# Altium PCB STM32F407ZGT6(Mini)核心板--尺寸图（PCB格式）.PcbDoc
Units mm, origin at the board's own origin, x right, y up, seen from the top; angles counter-clockwise.
Board outline 59.69 x 46.99 mm, 2 copper layers (Top Layer, Bottom Layer); 7 components, 0 nets, 289 pads, 0 vias.
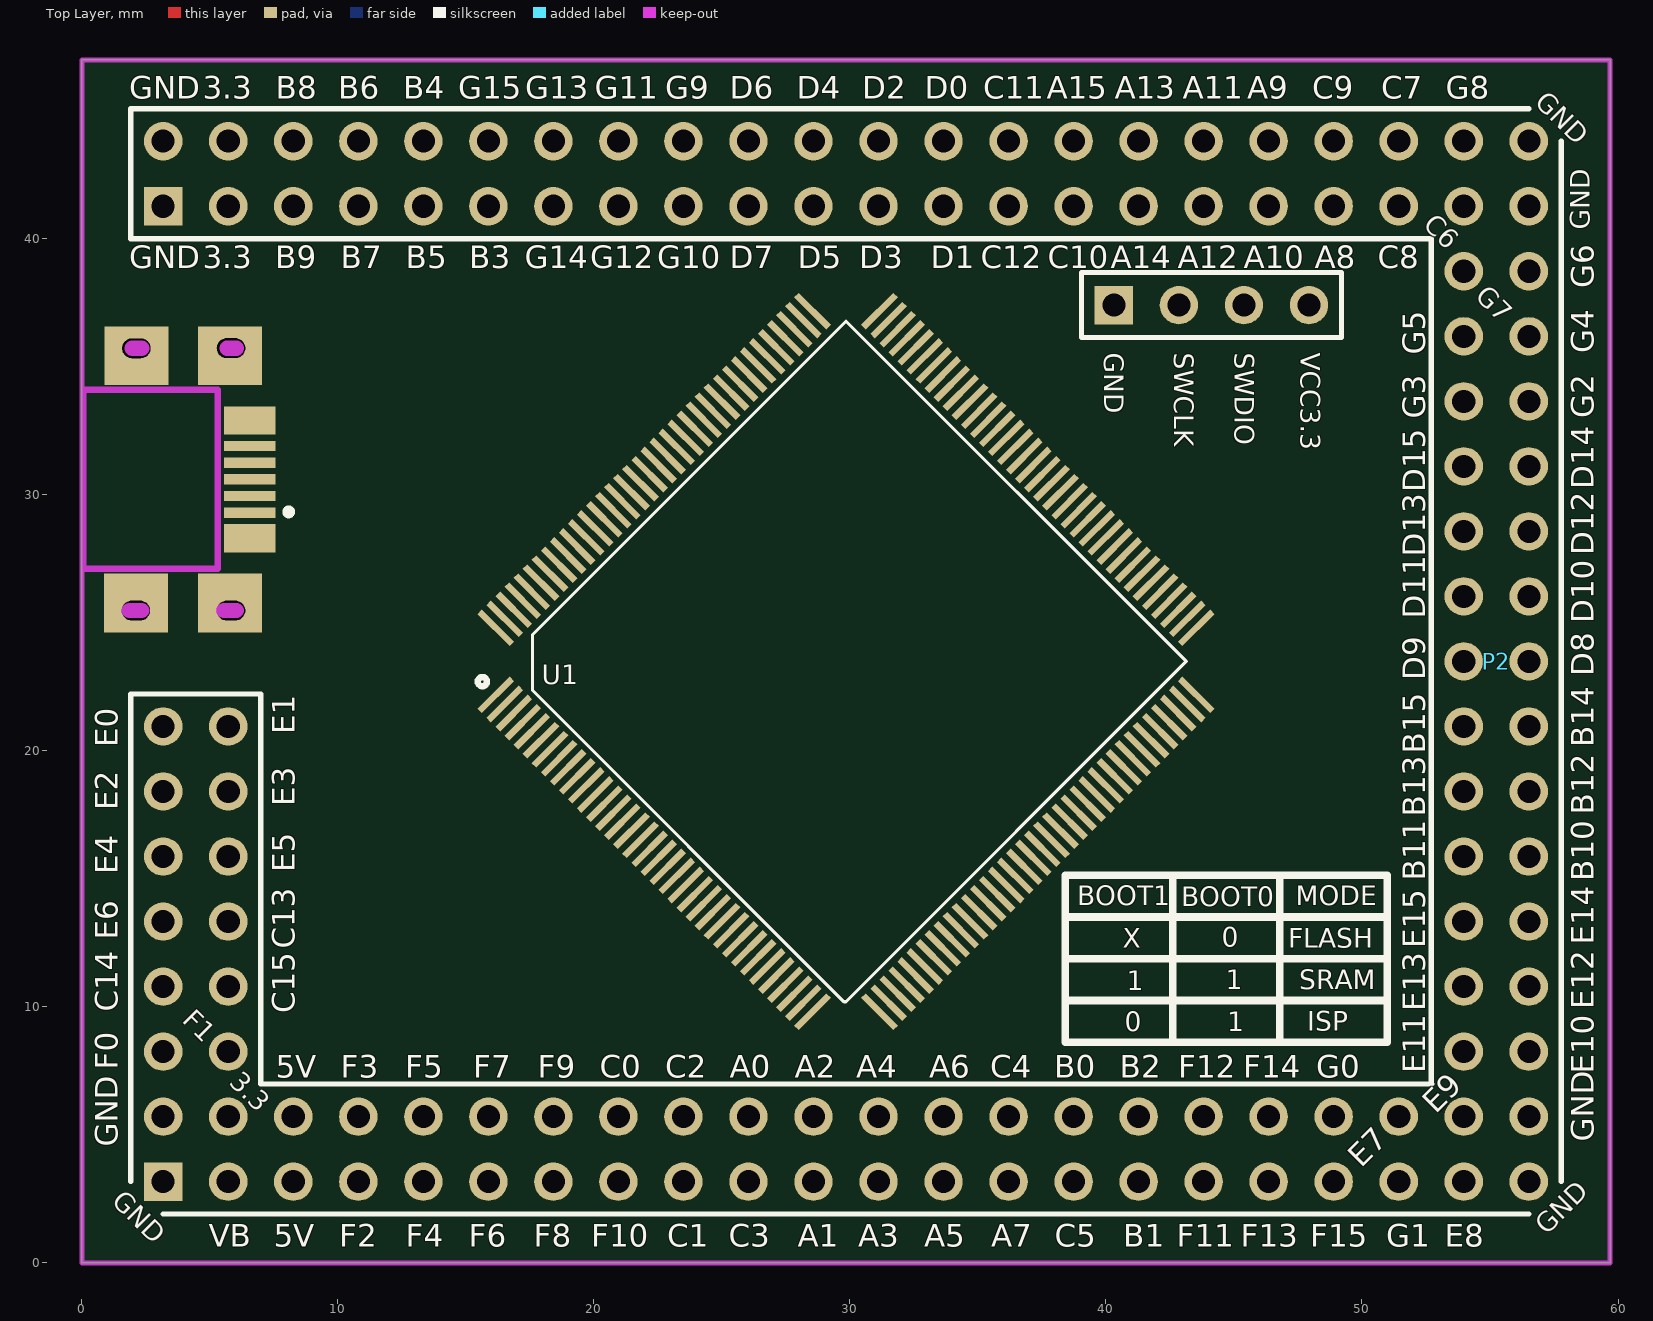
[diagram p0: Top Layer view]
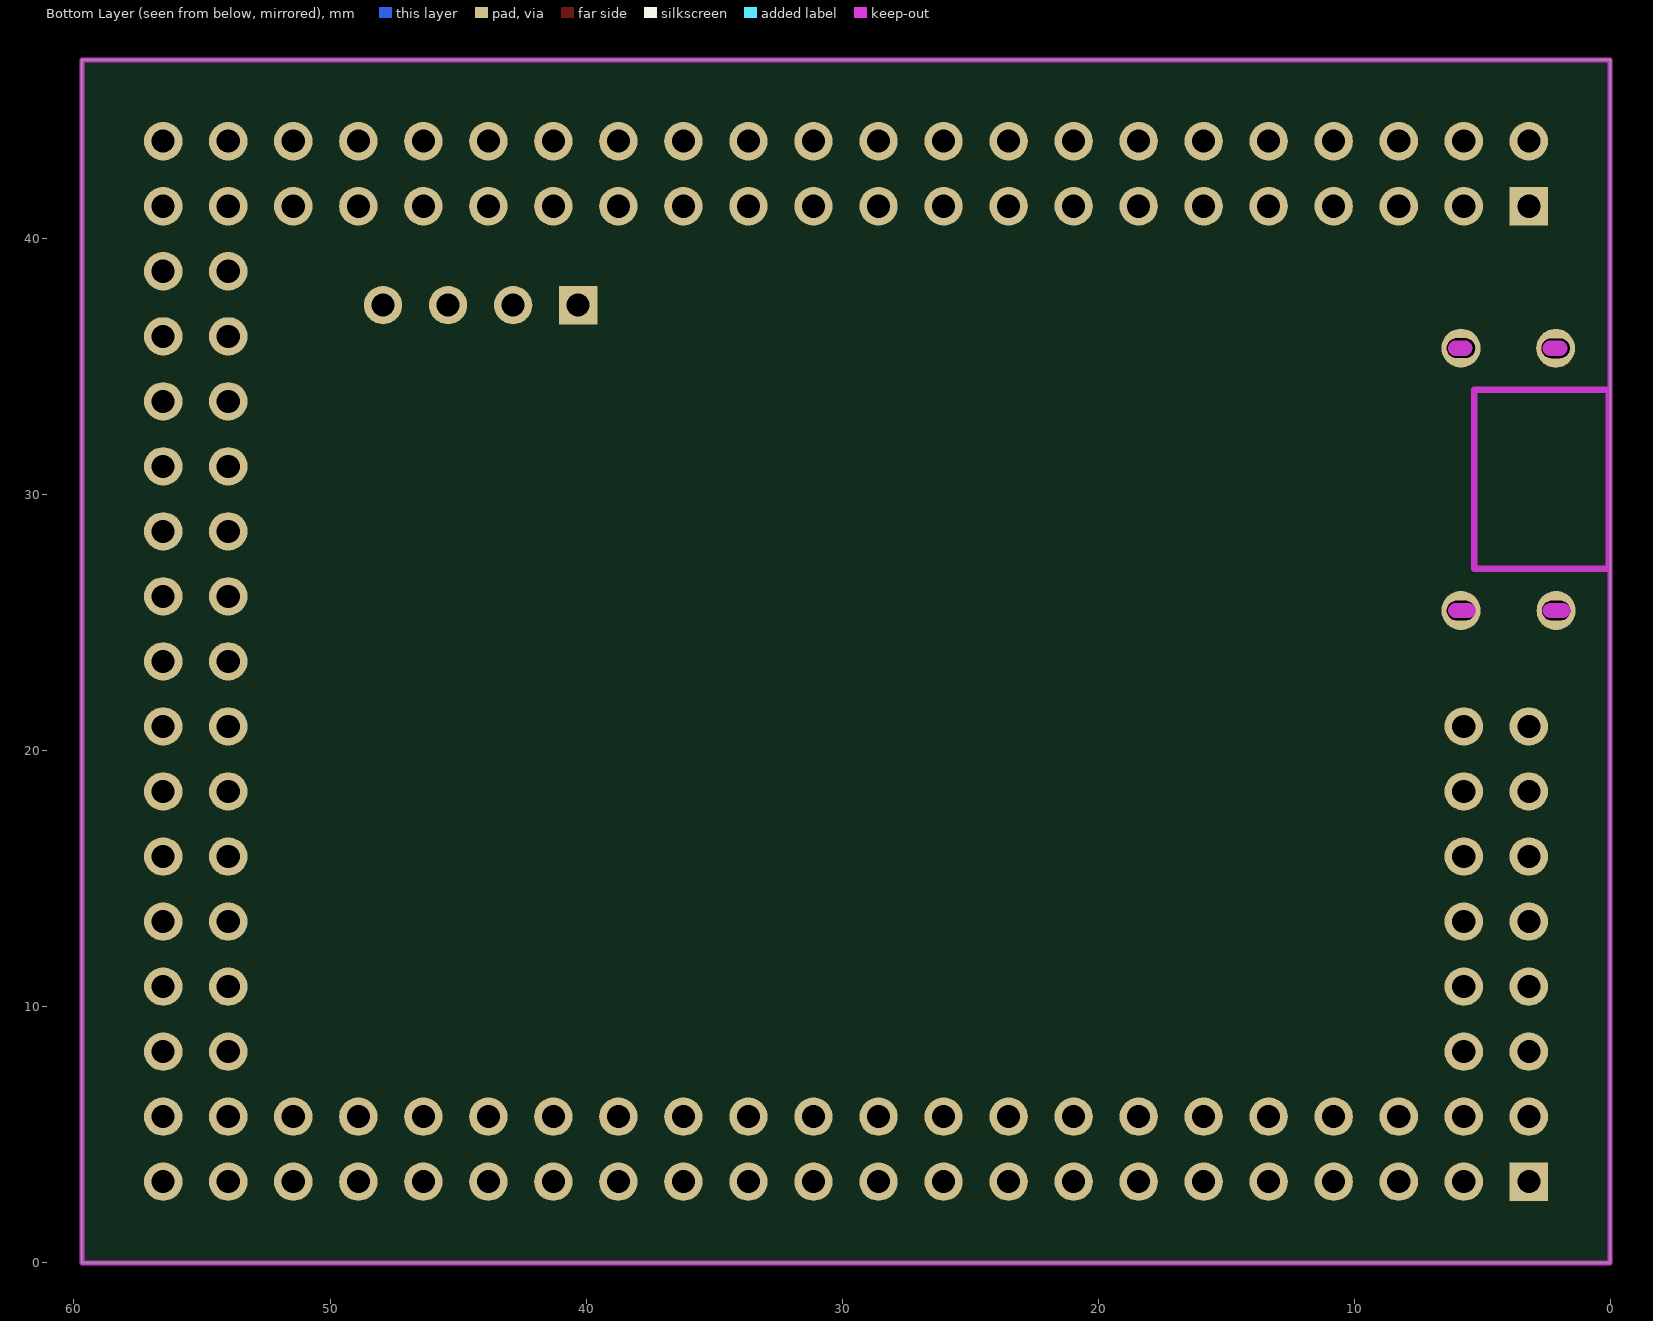
[diagram p1: Bottom Layer view, seen from below]

## Layer stack, top to bottom
Top Solder: solder mask 0.0102, Solder Resist, Dk 3.5
Top Layer: signal copper 0.0356
Dielectric1: dielectric 0.32, FR-4, Dk 4.8
Bottom Layer: signal copper 0.0356
Bottom Solder: solder mask 0.0102, Solder Resist, Dk 3.5

## Board outline
39.649,0 0,0 0,45.39 0,46.99 2.464,46.99 59.69,46.99 59.69,10.973 59.69,0 58.953,0

## Design rules (kind name [scope] priority, off if disabled: settings)
Clearance [All] p1: gap=0.203 ignorepadtopadclearanceinfootprint=FALSE except(0: Arc-Hole Track-Hole SMDPad-Hole THPad-Hole Via-Hole Fill-Hole Poly-Hole Region-Hole Text-Hole)
FabricationTestpoint [(IsPad And (OnTopLayer Or OnBottomLayer))] p1: side=3 testpointundercomponent=TRUE minsize=1.016 maxsize=2.54 preferedsize=1.524 minholesize=0 maxholesize=1.016 preferedholesize=0.813 testpointgrid=0.025 allowsidetop=TRUE allowsidebottom=TRUE usegrid=TRUE gridtolerance=0
HoleToHoleClearance [All] p1: gap=0 allowstackedmicrovias=TRUE
MinimumSolderMaskSliver [All] p1: minsoldermaskwidth=0
PolygonConnect PolygonConnect_1 [All vs (InPadClass('All Pads'))] p1: connectstyle=Relief reliefconductorwidth=0.762 reliefentries=4 polygonreliefangle="90 Angle" airgapwidth=0.254
PolygonConnect [All] p2: connectstyle=Direct reliefconductorwidth=0.762 reliefentries=4 polygonreliefangle="90 Angle" airgapwidth=0.254
RoutingVias [All] p1: holewidth=0.254 width=1.27 viastyle="Through Hole" minholewidth=0.127 minwidth=0.508 maxholewidth=0.762 maxwidth=0.762
SilkToSilkClearance [All] p1: silktosilkclearance=0
SilkToSolderMaskClearance SilkscreenOverComponentPads [IsPad] p1: minsilkscreentomaskgap=0 clearancetoexposedcopper=TRUE
SolderMaskExpansion [All] p1: expansion=0.102
Width [All] p1: maxlimit=1.27 minlimit=0.152 preferedwidth=0.254 minimp=50.000000 maximp=50.000000 favimp=50.000000
25 further rules are at their usual default settings.

## Classes and differential pairs
component class STM32F103ZET6原理图: U1

## Components (designator, comment, footprint, x,y, rotation, side; value= is the part's Value field where it differs from the comment)
P1 "Header 22X2" HDR2X22 3.175,3.175 r0 top
P2 "Header 13X2" HDR2X13 53.975,38.735 r270 top locked
P3 "Header 6X2" HDR2X6 5.715,8.255 r90 top locked
P4 "Header 22X2" HDR2X22 3.175,41.275 r0 top locked
P5 "4P,SWD" HDR1X4 40.31,37.414 r0 top locked
U1 "STM32F103ZE" TQFP-144 29.845,23.495 r45 top locked
? "Comment" "Micro_USB_v2 - duplicate" 6.299,30.607 r270 top

## Footprints (in the part's own frame and the unit in brackets; to place one, negate y for a bottom-side part, rotate by r counter-clockwise, add the part's x,y. Pads: shape width x height; smd on the part's side, far side on the other; paste and mask are expansions set on the pad)
HDR1X4 [mm]
  rect 1.5x1.5 hole 0.9: 1(0,0)
  round 1.5 hole 0.9: 2(2.54,0) 3(5.08,0) 4(7.62,0)
  silkscreen extent -1.27,-1.27 8.89,1.27
HDR2X6 [mm]
  round 1.5 hole 0.9: 1(0,0) 2(0,2.54) 3(2.54,0) 4(2.54,2.54) 5(5.08,0) 6(5.08,2.54) 7(7.62,0) 8(7.62,2.54) 9(10.16,0) 10(10.16,2.54) 11(12.7,0) 12(12.7,2.54)
  silkscreen extent -1.27,-1.27 13.97,3.81
HDR2X13 [mm]
  round 1.5 hole 0.9: 1(0,0) 2(0,2.54) 3(2.54,0) 4(2.54,2.54) 5(5.08,0) 6(5.08,2.54) 7(7.62,0) 8(7.62,2.54) 9(10.16,0) 10(10.16,2.54) 11(12.7,0) 12(12.7,2.54) 13(15.24,0) 14(15.24,2.54) 15(17.78,0) 16(17.78,2.54) 17(20.32,0) 18(20.32,2.54) 19(22.86,0) 20(22.86,2.54) 21(25.4,0) 22(25.4,2.54) 23(27.94,0) 24(27.94,2.54) 25(30.48,0) 26(30.48,2.54)
  silkscreen extent -1.27,-1.27 31.75,3.81
HDR2X22 [mm]
  rect 1.5x1.5 hole 0.9: 1(0,0)
  round 1.5 hole 0.9: 2(0,2.54) 3(2.54,0) 4(2.54,2.54) 5(5.08,0) 6(5.08,2.54) 7(7.62,0) 8(7.62,2.54) 9(10.16,0) 10(10.16,2.54) 11(12.7,0) 12(12.7,2.54) 13(15.24,0) 14(15.24,2.54) 15(17.78,0) 16(17.78,2.54) 17(20.32,0) 18(20.32,2.54) 19(22.86,0) 20(22.86,2.54) 21(25.4,0) 22(25.4,2.54) 23(27.94,0) 24(27.94,2.54) 25(30.48,0) 26(30.48,2.54) 27(33.02,0) 28(33.02,2.54) 29(35.56,0) 30(35.56,2.54) 31(38.1,0) 32(38.1,2.54) 33(40.64,0) 34(40.64,2.54) 35(43.18,0) 36(43.18,2.54) 37(45.72,0) 38(45.72,2.54) 39(48.26,0) 40(48.26,2.54) 41(50.8,0) 42(50.8,2.54) 43(53.34,0) 44(53.34,2.54)
  silkscreen extent -1.27,-1.27 54.61,3.81
"Micro_USB_v2 - duplicate" [mm]
  round 1.524 hole 0.762 slot 1.1 at 90 deg: 0(-5.125,-0.475) 0(-5.12,-4.175) 0(5.125,-0.475) 0(5.125,-4.191)
  rect 0.4x2 smd: 1(1.3,0.254) 2(0.65,0.254) 3(0,0.254) 4(-0.65,0.254) 5(-1.3,0.254)
  rect 2.3x2.5 smd: ""(-4.826,-0.508) ""(-4.826,-4.175) ""(4.826,-0.508) ""(4.826,-4.191)
  rect 1.1x2 smd: ""(-2.3,0.254) ""(2.3,0.254)
  Keep-Out Layer lines w0.254: -3.45,-6.25 3.5,-6.25 3.5,-1 ; -3.5,-6.25 -3.5,-1 ; 3.45,-1 -3.45,-1
  Keep-Out Layer lines w0.6: 5.125,-4.445 5.125,-3.962 ; -5.12,-4.335 -5.12,-3.962 ; 5.125,-0.762 5.125,-0.262 ; -5.125,-0.635 -5.125,-0.262
  silkscreen extent 1.15,1.65 1.4,1.9
TQFP-144 [mm]
  rect 1.778x0.254 smd: 1(-10.6,8.75) 2(-10.6,8.25) 3(-10.6,7.75) 4(-10.6,7.25) 5(-10.6,6.75) 6(-10.6,6.25) 7(-10.6,5.75) 8(-10.6,5.25) 9(-10.6,4.75) 10(-10.6,4.25) 11(-10.6,3.75) 12(-10.6,3.25) 13(-10.6,2.75) 14(-10.6,2.25) 15(-10.6,1.75) 16(-10.6,1.25) 17(-10.6,0.75) 18(-10.6,0.25) 19(-10.6,-0.25) 20(-10.6,-0.75) 21(-10.6,-1.25) 22(-10.6,-1.75) 23(-10.6,-2.25) 24(-10.6,-2.75) 25(-10.6,-3.25) 26(-10.6,-3.75) 27(-10.6,-4.25) 28(-10.6,-4.75) 29(-10.6,-5.25) 30(-10.6,-5.75) 31(-10.6,-6.25) 32(-10.6,-6.75) 33(-10.6,-7.25) 34(-10.6,-7.75) 35(-10.6,-8.25) 36(-10.6,-8.75) 73(10.6,-8.75) 74(10.6,-8.25) 75(10.6,-7.75) 76(10.6,-7.25) 77(10.6,-6.75) 78(10.6,-6.25) 79(10.6,-5.75) 80(10.6,-5.25) 81(10.6,-4.75) 82(10.6,-4.25) 83(10.6,-3.75) 84(10.6,-3.25) 85(10.6,-2.75) 86(10.6,-2.25) 87(10.6,-1.75) 88(10.6,-1.25) 89(10.6,-0.75) 90(10.6,-0.25) 91(10.6,0.25) 92(10.6,0.75) 93(10.6,1.25) 94(10.6,1.75) 95(10.6,2.25) 96(10.6,2.75) 97(10.6,3.25) 98(10.6,3.75) 99(10.6,4.25) 100(10.6,4.75) 101(10.6,5.25) 102(10.6,5.75) 103(10.6,6.25) 104(10.6,6.75) 105(10.6,7.25) 106(10.6,7.75) 107(10.6,8.25) 108(10.6,8.75)
  rect 0.254x1.778 smd: 37(-8.75,-10.6) 38(-8.25,-10.6) 39(-7.75,-10.6) 40(-7.25,-10.6) 41(-6.75,-10.6) 42(-6.25,-10.6) 43(-5.75,-10.6) 44(-5.25,-10.6) 45(-4.75,-10.6) 46(-4.25,-10.6) 47(-3.75,-10.6) 48(-3.25,-10.6) 49(-2.75,-10.6) 50(-2.25,-10.6) 51(-1.75,-10.6) 52(-1.25,-10.6) 53(-0.75,-10.6) 54(-0.25,-10.6) 55(0.25,-10.6) 56(0.75,-10.6) 57(1.25,-10.6) 58(1.75,-10.6) 59(2.25,-10.6) 60(2.75,-10.6) 61(3.25,-10.6) 62(3.75,-10.6) 63(4.25,-10.6) 64(4.75,-10.6) 65(5.25,-10.6) 66(5.75,-10.6) 67(6.25,-10.6) 68(6.75,-10.6) 69(7.25,-10.6) 70(7.75,-10.6) 71(8.25,-10.6) 72(8.75,-10.6) 109(8.75,10.6) 110(8.25,10.6) 111(7.75,10.6) 112(7.25,10.6) 113(6.75,10.6) 114(6.25,10.6) 115(5.75,10.6) 116(5.25,10.6) 117(4.75,10.6) 118(4.25,10.6) 119(3.75,10.6) 120(3.25,10.6) 121(2.75,10.6) 122(2.25,10.6) 123(1.75,10.6) 124(1.25,10.6) 125(0.75,10.6) 126(0.25,10.6) 127(-0.25,10.6) 128(-0.75,10.6) 129(-1.25,10.6) 130(-1.75,10.6) 131(-2.25,10.6) 132(-2.75,10.6) 133(-3.25,10.6) 134(-3.75,10.6) 135(-4.25,10.6) 136(-4.75,10.6) 137(-5.25,10.6) 138(-5.75,10.6) 139(-6.25,10.6) 140(-6.75,10.6) 141(-7.25,10.6) 142(-7.75,10.6) 143(-8.25,10.6) 144(-8.75,10.6)
  silkscreen extent -10.78,-9.4 9.4,9.66

## Nets (pads, with @x,y where several pads share a name; then routed paths per layer and width w, separated by ;. In a path a pad name is that pad's centre, name@x,y a point inside that pad or via, vN(x,y) a via of type N, cw(c..) or ccw(c..) an arc to the next point about the centre after c; other vN are vias at no path point)
pads on no net: ?. ?.0 ?.1 ?.2 ?.3 ?.4 ?.5 P1.1 P1.2 P1.3 P1.4 P1.5 P1.6 P1.7 P1.8 P1.9 P1.10 P1.11 P1.12 P1.13 P1.14 P1.15 P1.16 P1.17 P1.18 P1.19 P1.20 P1.21 P1.22 P1.23 P1.24 P1.25 P1.26 P1.27 P1.28 P1.29 P1.30 P1.31 P1.32 P1.33 P1.34 P1.35 P1.36 P1.37 P1.38 P1.39 P1.40 P1.41 P1.42 P1.43 P1.44 P2.1 P2.2 P2.3 P2.4 P2.5 P2.6 P2.7 P2.8 P2.9 P2.10 P2.11 P2.12 P2.13 P2.14 P2.15 P2.16 P2.17 P2.18 P2.19 P2.20 P2.21 P2.22 P2.23 P2.24 P2.25 P2.26 P3.1 P3.2 P3.3 P3.4 P3.5 P3.6 P3.7 P3.8 P3.9 P3.10 P3.11 P3.12 P4.1 P4.2 P4.3 P4.4 P4.5 P4.6 P4.7 P4.8 P4.9 P4.10 P4.11 P4.12 P4.13 P4.14 P4.15 P4.16 P4.17 P4.18 P4.19 P4.20 P4.21 P4.22 P4.23 P4.24 P4.25 P4.26 P4.27 P4.28 P4.29 P4.30 P4.31 P4.32 P4.33 P4.34 P4.35 P4.36 P4.37 P4.38 P4.39 P4.40 P4.41 P4.42 P4.43 P4.44 P5.1 P5.2 P5.3 P5.4 U1.1 U1.2 U1.3 U1.4 U1.5 U1.6 U1.7 U1.8 U1.9 U1.10 U1.11 U1.12 U1.13 U1.14 U1.15 U1.16 U1.17 U1.18 U1.19 U1.20 U1.21 U1.22 U1.23 U1.24 U1.25 U1.26 U1.27 U1.28 U1.29 U1.30 U1.31 U1.32 U1.33 U1.34 U1.35 U1.36 U1.37 U1.38 U1.39 U1.40 U1.41 U1.42 U1.43 U1.44 U1.45 U1.46 U1.47 U1.48 U1.49 U1.50 U1.51 U1.52 U1.53 U1.54 U1.55 U1.56 U1.57 U1.58 U1.59 U1.60 U1.61 U1.62 U1.63 U1.64 U1.65 U1.66 U1.67 U1.68 U1.69 U1.70 U1.71 U1.72 U1.73 U1.74 U1.75 U1.76 U1.77 U1.78 U1.79 U1.80 U1.81 U1.82 U1.83 U1.84 U1.85 U1.86 U1.87 U1.88 U1.89 U1.90 U1.91 U1.92 U1.93 U1.94 U1.95 U1.96 U1.97 U1.98 U1.99 U1.100 U1.101 U1.102 U1.103 U1.104 U1.105 U1.106 U1.107 U1.108 U1.109 U1.110 U1.111 U1.112 U1.113 U1.114 U1.115 U1.116 U1.117 U1.118 U1.119 U1.120 U1.121 U1.122 U1.123 U1.124 U1.125 U1.126 U1.127 U1.128 U1.129 U1.130 U1.131 U1.132 U1.133 U1.134 U1.135 U1.136 U1.137 U1.138 U1.139 U1.140 U1.141 U1.142 U1.143 U1.144

## Keep-outs
Keep-Out Layer:
  lines w0.203: 0,0 59.69,0 59.69,46.99 0,46.99 0,0

## Silkscreen, mask and mechanical layers (free items; w line width, h text height)
Top Overlay:
  lines w0.3: 38.411,10.25 50.984,10.25 ; 38.411,11.882 50.984,11.882 ; 38.411,13.514 50.984,13.514 ; 42.602,8.618 42.602,15.146 ; 46.793,8.618 46.793,15.146 ; 38.411,8.618 38.411,15.146 50.984,15.146 50.984,8.618 38.411,8.618
  text "GND" at 1.854,45.466 h0.89
  text "3.3" at 4.724,45.466 h0.89
  text "B8" at 7.569,45.466 h0.89
  text "B6" at 10.008,45.466 h0.89
  text "B4" at 12.548,45.466 h0.89
  text "G15" at 14.707,45.466 h0.89
  text "G13" at 17.323,45.466 h0.89
  text "G11" at 20.041,45.466 h0.89
  text "G9" at 22.784,45.466 h0.89
  text "D6" at 25.298,45.466 h0.89
  text "D4" at 27.915,45.466 h0.89
  text "D2" at 30.48,45.466 h0.89
  text "D0" at 32.918,45.466 h0.89
  text "C11" at 35.204,45.466 h0.89
  text "A15" at 37.694,45.466 h0.89
  text "A13" at 40.335,45.466 h0.89
  text "A11" at 43.002,45.466 h0.89
  text "A9" at 45.517,45.466 h0.89
  text "C9" at 48.057,45.466 h0.89
  text "C7" at 50.749,45.466 h0.89
  text "G8" at 53.264,45.466 h0.89
  text "GND" at 56.718,45.288 h0.76 r315
  text "C6" at 52.349,40.513 h0.76 r315
  text "GND" at 58.903,40.361 h0.76 r90
  text "GND" at 1.854,38.862 h0.89
  text "3.3" at 4.724,38.862 h0.89
  text "B9" at 7.544,38.862 h0.89
  text "B7" at 10.109,38.862 h0.89
  text "B5" at 12.649,38.862 h0.89
  text "B3" at 15.138,38.862 h0.89
  text "G14" at 17.297,38.862 h0.89
  text "G12" at 19.863,38.862 h0.89
  text "G10" at 22.479,38.862 h0.89
  text "D7" at 25.298,38.862 h0.89
  text "D5" at 27.965,38.862 h0.89
  text "D3" at 30.353,38.862 h0.89
  text "D1" at 33.147,38.862 h0.89
  text "C12" at 35.103,38.862 h0.89
  text "C10" at 37.719,38.862 h0.89
  text "A14" at 40.183,38.862 h0.89
  text "A12" at 42.799,38.862 h0.89
  text "A10" at 45.39,38.862 h0.89
  text "A8" at 48.158,38.862 h0.89
  text "C8" at 50.622,38.862 h0.89
  text "G6" at 59.055,38.075 h0.89 r90
  text "G7" at 54.381,37.719 h0.76 r315
  text "GND" at 39.929,35.56 h0.76 r270
  text "SWCLK" at 42.672,35.56 h0.76 r270
  text "SWDIO" at 45.034,35.56 h0.76 r270
  text "VCC3.3" at 47.6,35.56 h0.76 r270
  text "G4" at 59.055,35.535 h0.89 r90
  text "G5" at 52.476,35.484 h0.89 r90
  text "G2" at 59.055,32.995 h0.89 r90
  text "G3" at 52.476,32.969 h0.89 r90
  text "D14" at 59.055,30.226 h0.89 r90
  text "D15" at 52.476,30.099 h0.89 r90
  text "D12" at 59.055,27.635 h0.89 r90
  text "D13" at 52.476,27.584 h0.89 r90
  text "D11" at 52.476,25.171 h0.89 r90
  text "D10" at 59.055,24.994 h0.89 r90
  text "D8" at 59.055,22.911 h0.89 r90
  text "D9" at 52.476,22.758 h0.89 r90
  text "E1" at 8.306,20.65 h0.89 r90
  text "E0" at 1.397,20.142 h0.89 r90
  text "B14" at 59.055,20.142 h0.89 r90
  text "B15" at 52.476,19.888 h0.89 r90
  text "E3" at 8.306,17.831 h0.89 r90
  text "E2" at 1.397,17.678 h0.89 r90
  text "B12" at 59.055,17.501 h0.89 r90
  text "B13" at 52.476,17.424 h0.89 r90
  text "E5" at 8.306,15.265 h0.89 r90
  text "E4" at 1.397,15.189 h0.89 r90
  text "B11" at 52.476,14.935 h0.89 r90
  text "B10" at 59.055,14.91 h0.89 r90
  text "BOOT1" at 38.868,13.965 h0.76
  text "MODE" at 47.403,13.965 h0.76
  text "BOOT0" at 42.932,13.94 h0.76
  text "E6" at 1.397,12.624 h0.89 r90
  text "E14" at 59.055,12.421 h0.89 r90
  text "0" at 44.516,12.345 h0.76
  text "X" at 40.655,12.32 h0.76
  text "FLASH" at 47.123,12.314 h0.76
  text "E15" at 52.476,12.294 h0.89 r90
  text "C13" at 8.306,12.268 h0.89 r90
  text "1" at 44.669,10.694 h0.76
  text "SRAM" at 47.555,10.689 h0.76
  text "1" at 40.808,10.643 h0.76
  text "E12" at 59.055,9.906 h0.89 r90
  text "E13" at 52.476,9.83 h0.89 r90
  text "C14" at 1.397,9.804 h0.89 r90
  text "C15" at 8.306,9.754 h0.89 r90
  text "F1" at 3.886,9.449 h0.76 r315
  text "ISP" at 47.86,9.063 h0.76
  text "0" at 40.732,9.043 h0.76
  text "1" at 44.745,9.043 h0.76
  text "F0" at 1.397,7.544 h0.89 r90
  text "E11" at 52.476,7.417 h0.89 r90
  text "E10" at 59.055,7.391 h0.89 r90
  text "5V" at 7.569,7.239 h0.89
  text "F3" at 10.109,7.239 h0.89
  text "F5" at 12.624,7.239 h0.89
  text "F7" at 15.291,7.239 h0.89
  text "F9" at 17.805,7.239 h0.89
  text "C0" at 20.218,7.239 h0.89
  text "C2" at 22.784,7.239 h0.89
  text "A0" at 25.298,7.239 h0.89
  text "A2" at 27.838,7.239 h0.89
  text "A4" at 30.251,7.239 h0.89
  text "A6" at 33.096,7.239 h0.89
  text "C4" at 35.484,7.239 h0.89
  text "B0" at 37.973,7.239 h0.89
  text "B2" at 40.538,7.239 h0.89
  text "F12" at 42.824,7.239 h0.89
  text "F14" at 45.364,7.239 h0.89
  text "G0" at 48.209,7.239 h0.89
  text "3.3" at 5.715,7.01 h0.76 r315
  text "E9" at 52.883,5.791 h0.89 r45
  text "GND" at 59.055,4.724 h0.89 r90
  text "GND" at 1.397,4.547 h0.89 r90
  text "E7" at 49.962,3.683 h0.89 r45
  text "GND" at 1.118,2.362 h0.76 r315
  text "GND" at 57.226,1.067 h0.76 r45
  text "VB" at 4.953,0.635 h0.89
  text "5V" at 7.493,0.635 h0.89
  text "F2" at 10.058,0.635 h0.89
  text "F4" at 12.649,0.635 h0.89
  text "F6" at 15.113,0.635 h0.89
  text "F8" at 17.653,0.635 h0.89
  text "F10" at 19.888,0.635 h0.89
  text "C1" at 22.86,0.635 h0.89
  text "C3" at 25.273,0.635 h0.89
  text "A1" at 27.965,0.635 h0.89
  text "A3" at 30.328,0.635 h0.89
  text "A5" at 32.893,0.635 h0.89
  text "A7" at 35.509,0.635 h0.89
  text "C5" at 37.998,0.635 h0.89
  text "B1" at 40.665,0.635 h0.89
  text "F11" at 42.774,0.635 h0.89
  text "F13" at 45.263,0.635 h0.89
  text "F15" at 47.981,0.635 h0.89
  text "G1" at 50.952,0.635 h0.89
  text "E8" at 53.238,0.635 h0.89